# Altium PCB RadioPod_2.PcbDoc
Units mm, origin at the board's own origin, x right, y up, seen from the top; angles counter-clockwise.
Board outline 152.4 x 101.6 mm, 3 copper layers (Top Layer, GND, Bottom Layer), stack 0.488 mm thick; 79 components, 93 nets, 358 pads, 17 vias.
Unrouted connection lines stored in the file: 69.
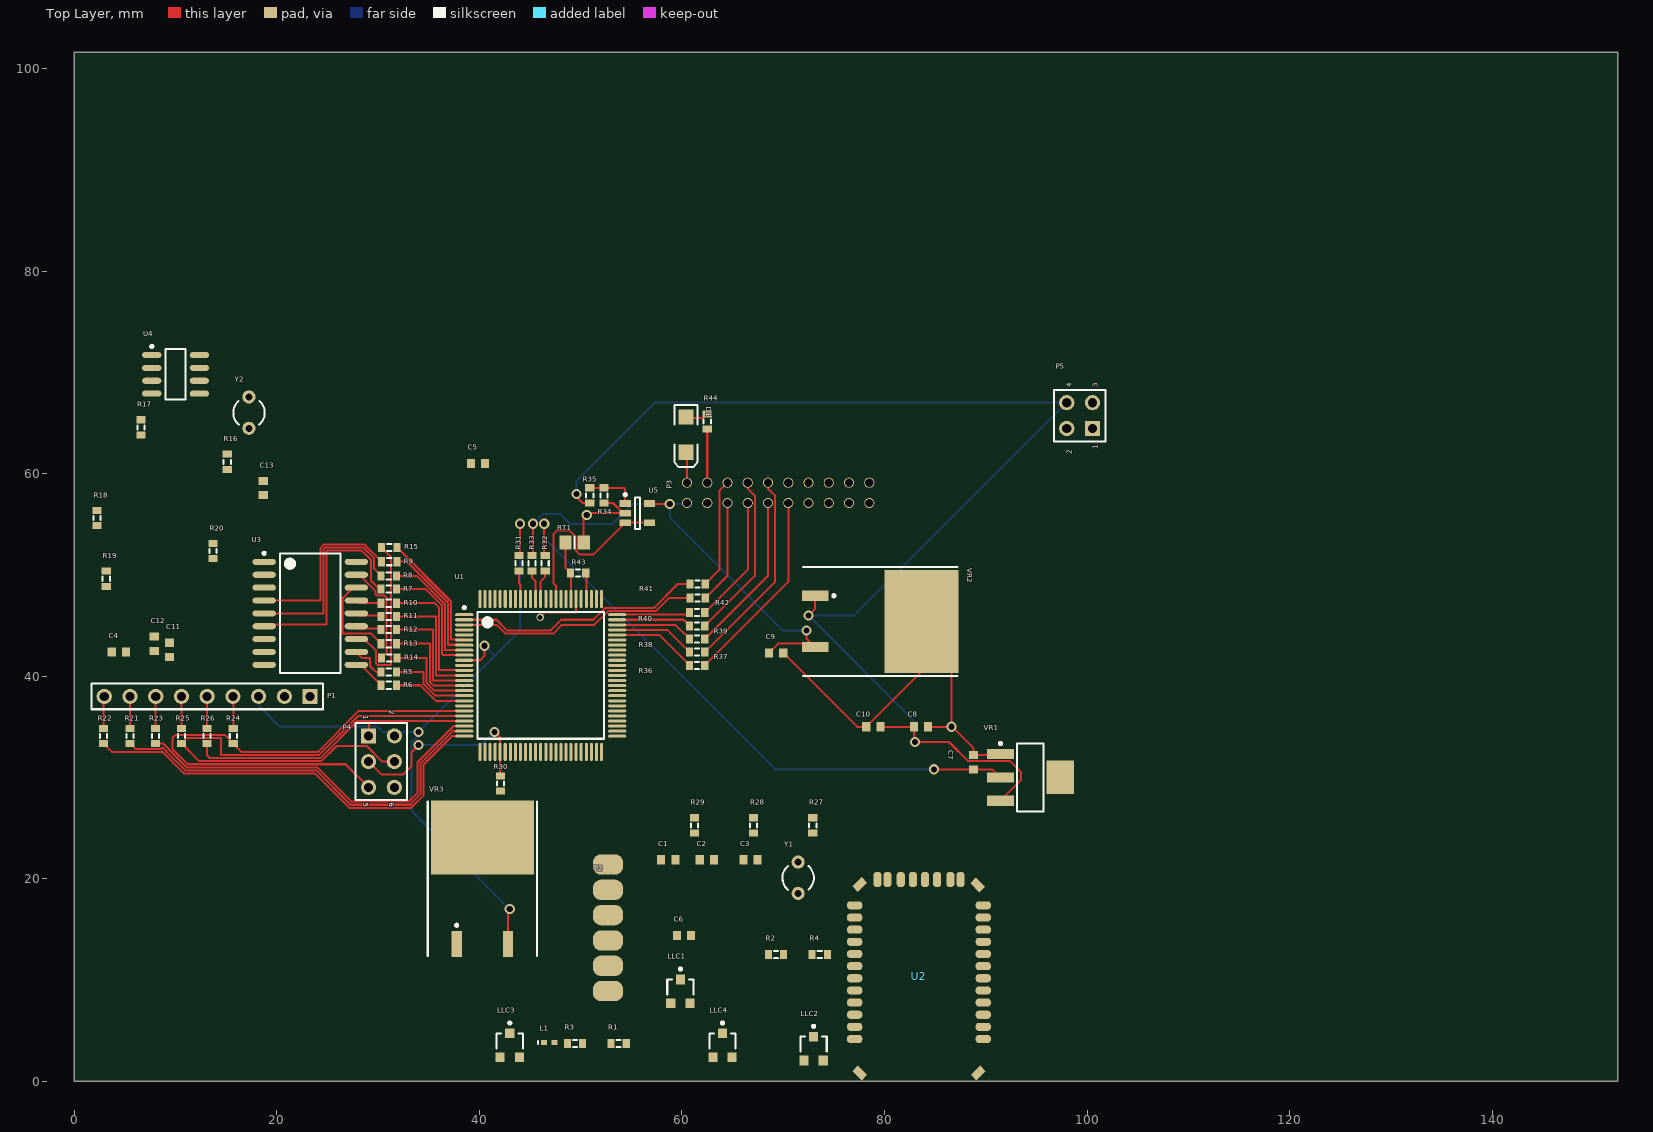
[diagram p0: Top Layer view]
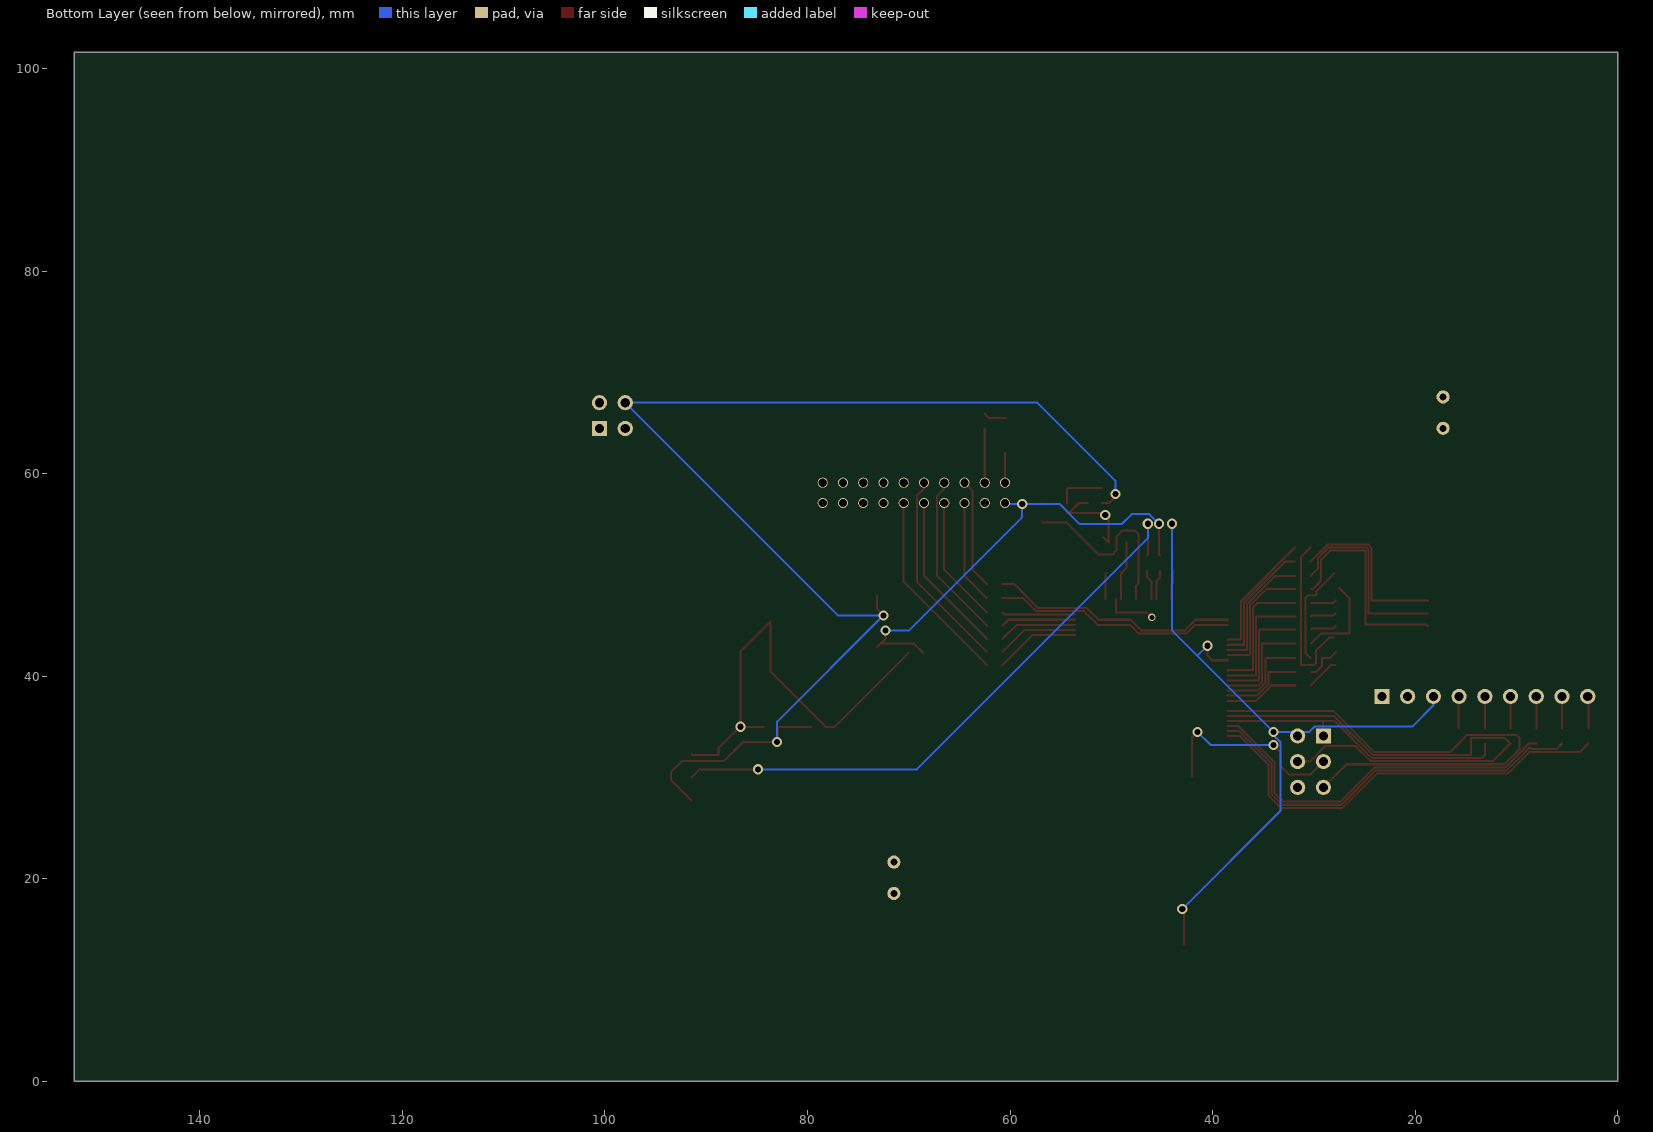
[diagram p1: Bottom Layer view, seen from below]
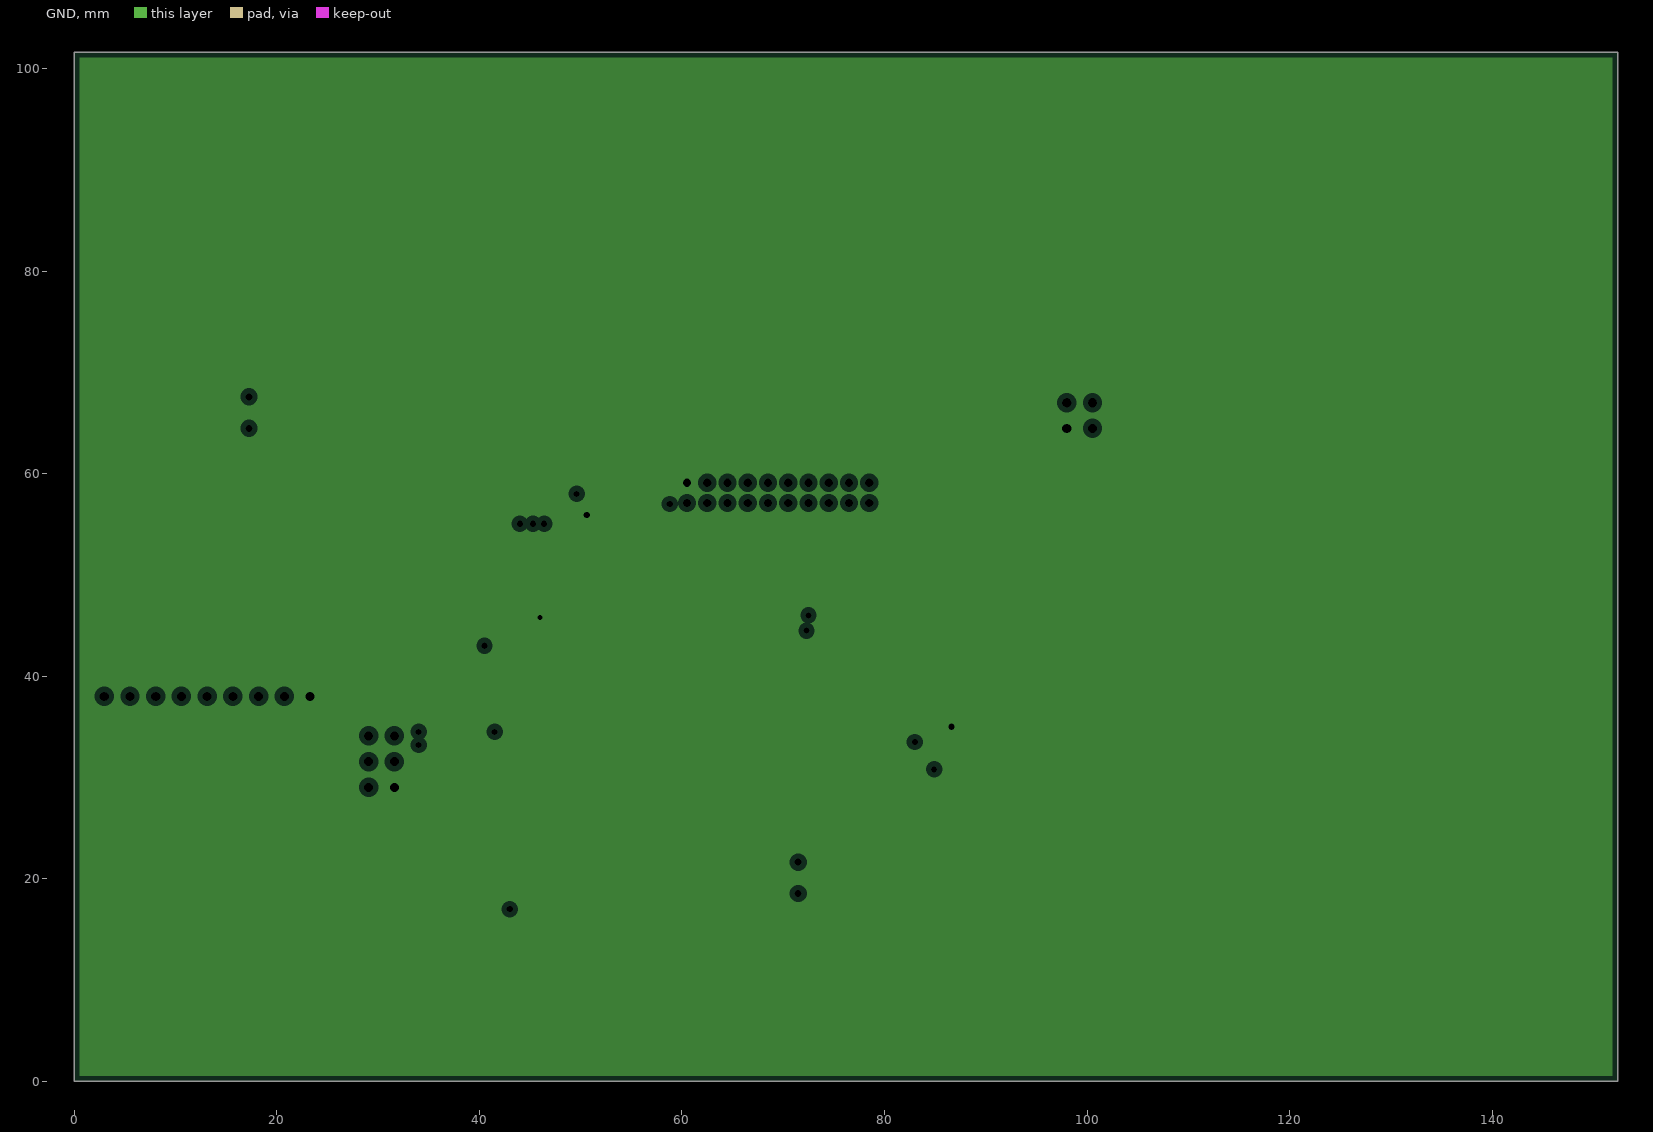
[diagram p2: GND, clearances drawn from the general rule]

## Layer stack, top to bottom
Top Solder: solder mask 0.0102, Solder Resist, Dk 3.5
Top Layer: signal copper 0.0356
Dielectric 1: core 0.254, FR-4, Dk 4.2
GND: plane copper 0.036, net GND
Dielectric 2: prepreg 0.127, Dk 4.2
Bottom Layer: signal copper 0.0356
Bottom Solder: solder mask 0.0102, Solder Resist, Dk 3.5

## Board outline
0,0 152.4,0 152.4,101.6 0,101.6

## Design rules (kind name [scope] priority, off if disabled: settings)
Clearance [All] p1: gap=0.1
PlaneClearance [All] p1: clearance=0.508
PlaneConnect [All] p1: planeconnectstyle=Relief reliefexpansion=0.508 reliefentries=4 reliefconductorwidth=0.254 reliefairgap=0.254
PolygonConnect [All] p1: connectstyle=Relief reliefconductorwidth=0.254 reliefentries=4 polygonreliefangle="90 Angle" airgapwidth=0.254
RoomDefinition RadioPod_2 [InComponentClass('RadioPod_2')] p1 off: confinementstyle=ConfineIn formatcopy=TRUE lockcomponents=FALSE outline 311.355,127.9 469.855,127.9 469.855,233.4 311.355,233.4
RoutingVias [All] p1: holewidth=0.711 width=1.27 viastyle="Through Hole" minholewidth=0.711 minwidth=1.27 maxholewidth=0.711 maxwidth=1.27
SolderMaskExpansion [All] p1: expansion=0.102
Width [All] p1: maxlimit=0.4 minlimit=0.05 preferedwidth=0.2 minimp=50.000000 maximp=50.000000 favimp=50.000000
28 further rules are at their usual default settings.

## Classes and differential pairs
component class RadioPod_2: 90 270 C1 C2 C3 C4 C5 C6 C7 C8 C9 C10 C11 C12 C13 L1 LLC1 LLC2 LLC3 LLC4 P2 P4 P5 R1 R2 R3 R4 R5 R6 R7 R8 R9 R10 R11 R12 R13 R14 R15 R16 R17 R18 R19 R20 R21 R22 R23 R24 R25 R26 R27 R28 R29 R30 R34 R35 R36 R37 R38 R39 R40 R41 R42 R43 R44 RT1 U1 U2 U3 U4 U5 VR1 VR2 VR3 Y1 Y2

## Components (designator, comment, footprint, x,y, rotation, side; value= is the part's Value field where it differs from the comment)
C1 "Cap Semi" 1608[0603] 58.645,21.868 r0 top
C2 "Cap Semi" 1608[0603] 62.455,21.868 r0 top
C3 "Cap Semi" 1608[0603] 66.773,21.868 r0 top
C4 "Cap Semi" 1608[0603] 4.4,42.4 r0 top
C5 "Cap Semi" 1608[0603] 39.859,61 r0 top
C6 "Cap Semi" 1608[0603] 60.2,14.4 r0 top
C7 "Cap Semi" 1608[0603] 88.8,31.5 r270 top
C8 "Cap Semi" 1608[0603] 83.6,35 r180 top
C9 "Cap Semi" 1608[0603] 69.3,42.3 r0 top
C10 "Cap Semi" 1608[0603] 78.9,35 r180 top
C11 "Cap Semi" 1608[0603] 9.4,42.6 r90 top
C12 "Cap Semi" 1608[0603] 7.9,43.2 r90 top
C13 "Cap Semi" 1608[0603] 18.655,58.568 r90 top
D1 "LED" 3.2X1.6X1.1 60.4,63.85 r270 top
L1 "Inductor" 0402-A 46.9,3.825 r0 top
LLC1 "BSS138" SOT-23 59.85,8.875 r0 top
LLC2 "BSS138" SOT-23 73,3.225 r0 top
LLC3 "BSS138" SOT-23 43,3.55 r0 top
LLC4 "BSS138" SOT-23 64,3.55 r0 top
P1 "Comment" HDR1X9 23.28,38 r180 top
P2 "EM-506" EM_506 51.2,7.9 r0 top
P3 "9XTend Header" "9XTend Header" 79,56.6 r90 top
P4 "ISP Header" HDR2X3 29.06,34.1 r270 top
P5 "Bus Connector" HDR2X2 100.54,64.46 r90 top
R1 "Res3" J1-0603 53.75,3.725 r0 top
R2 "Res3" J1-0603 69.293,12.5 r0 top
R3 "Res3" J1-0603 49.432,3.725 r0 top
R4 "Res3" J1-0603 73.611,12.5 r0 top
R5 "Res3" J1-0603 31.05,40.4 r0 top
R6 "Res3" J1-0603 31.05,39.1 r0 top
R7 "Res3" J1-0603 31.05,48.6 r0 top
R8 "Res3" J1-0603 31.05,49.9 r0 top
R9 "Res3" J1-0603 31.1,51.3 r0 top
R10 "Res3" J1-0603 31.05,47.2 r0 top
R11 "Res3" J1-0603 31.05,45.9 r0 top
R12 "Res3" J1-0603 31.05,44.6 r0 top
R13 "Res3" J1-0603 31.05,43.2 r0 top
R14 "Res3" J1-0603 31.1,41.8 r0 top
R15 "Res3" J1-0603 31.1,52.7 r0 top
R16 "Res3" J1-0603 15.104,61.165 r90 top
R17 "Res3" J1-0603 6.573,64.568 r90 top
R18 "Res3" J1-0603 2.249,55.618 r90 top
R19 "Res3" J1-0603 3.155,49.618 r90 top
R20 "Res3" J1-0603 13.7,52.35 r90 top
R21 "Res3" J1-0603 5.5,34.1 r270 top
R22 "Res3" J1-0603 2.9,34.1 r270 top
R23 "Res3" J1-0603 8,34.1 r270 top
R24 "Res3" J1-0603 15.7,34.1 r270 top
R25 "Res3" J1-0603 10.6,34.1 r270 top
R26 "Res3" J1-0603 13.1,34.1 r270 top
R27 "Res3" J1-0603 72.916,25.265 r90 top
R28 "Res3" J1-0603 67.074,25.265 r90 top
R29 "Res3" J1-0603 61.232,25.265 r90 top
R30 "Res3" J1-0603 42.1,29.4 r90 top
R31 "Res3" J1-0603 43.9,51.15 r90 top
R32 "Res3" J1-0603 46.5,51.15 r90 top
R33 "Res3" J1-0603 45.2,51.15 r90 top
R34 "Res3" J1-0603 50.9,57.85 r90 top
R35 "Res3" J1-0603 52.3,57.85 r90 top
R36 "Res3" J1-0603 61.505,41.068 r0 top
R37 "Res3" J1-0603 61.505,42.368 r0 top
R38 "Res3" J1-0603 61.505,43.668 r0 top
R39 "Res3" J1-0603 61.505,44.968 r0 top
R40 "Res3" J1-0603 61.505,46.268 r0 top
R41 "Res3" J1-0603 61.55,49.1 r0 top
R42 "Res3" J1-0603 61.55,47.7 r0 top
R43 "Res3" J1-0603 49.75,50.2 r180 top
R44 "Res3" J1-0603 62.5,65.15 r90 top
RT1 "Res Thermal" 6-0805_N 49.4,53.2 r0 top
U1 "ATmega1280-16AU" 100A_N 46.055,40.068 r0 top
U2 "RN-41" RN41 90.005,20.168 r180 top
U3 "MCP2515-I/SO" SOIC-SO18_N 23.3,46.2 r0 top
U4 "TJA1040" SO8_L 10,69.8 r0 top
U5 "MCP6001UT" SOT-23-OT5_N 55.6,56.1 r0 top
VR1 "NCV1117ST33T3G" SOT223_M 94.4,30 r0 top
VR2 "MC7805ACD2T" 936-03 78.4,45.4 r270 top
VR3 "MC7805ACD2T" 936-03 40.3,18.8 r0 top
Y1 "16MHz" R38 71.472,20.09 r0 top
Y2 "20MHz" R38 17.246,66.022 r0 top

## Footprints (in the part's own frame and the unit in brackets; to place one, negate y for a bottom-side part, rotate by r counter-clockwise, add the part's x,y. Pads: shape width x height; smd on the part's side, far side on the other; paste and mask are expansions set on the pad)
3.2X1.6X1.1 [mm] "SMT LED; 2 Flat Leads"
  rect 1.5x1.5 smd: 1(-1.75,0) 2(1.75,0)
  silkscreen extent -2.9,-1.15 3.2,1.15
6-0805_N [mm] "Chip Resistor, Body 2.0x1.2mm, IPC Medium Density"
  rect 1.2x1.4 smd: 1(-0.9,0) 2(0.9,0)
  silkscreen extent 0,-0.6 0,0.6, body extent -1.07,-0.7 1.07,0.7, height 0.7
"9XTend Header" [mm]
  round 1 hole 0.8: P1(0.5,18.5) P2(2.5,18.5) P3(0.5,16.5) P4(2.5,16.5) P5(0.5,14.5) P6(2.5,14.5) P7(0.5,12.5) P8(2.5,12.5) P9(0.5,10.5) P10(2.5,10.5) P11(0.5,8.5) P12(2.5,8.5) P13(0.5,6.5) P14(2.5,6.5) P15(0.5,4.5) P16(2.5,4.5) P17(0.5,2.5) P18(2.5,2.5) P19(0.5,0.5) P20(2.5,0.5)
100A_N [mm] "Thin QFP, 100-Leads, Body 14x14mm, Pitch 0.5mm, IPC Medium Density"
  oval 1.8x0.3 smd: 1(-7.55,6) 2(-7.55,5.5) 3(-7.55,5) 4(-7.55,4.5) 5(-7.55,4) 6(-7.55,3.5) 7(-7.55,3) 8(-7.55,2.5) 9(-7.55,2) 10(-7.55,1.5) 11(-7.55,1) 12(-7.55,0.5) 13(-7.55,0) 14(-7.55,-0.5) 15(-7.55,-1) 16(-7.55,-1.5) 17(-7.55,-2) 18(-7.55,-2.5) 19(-7.55,-3) 20(-7.55,-3.5) 21(-7.55,-4) 22(-7.55,-4.5) 23(-7.55,-5) 24(-7.55,-5.5) 25(-7.55,-6) 51(7.55,-6) 52(7.55,-5.5) 53(7.55,-5) 54(7.55,-4.5) 55(7.55,-4) 56(7.55,-3.5) 57(7.55,-3) 58(7.55,-2.5) 59(7.55,-2) 60(7.55,-1.5) 61(7.55,-1) 62(7.55,-0.5) 63(7.55,0) 64(7.55,0.5) 65(7.55,1) 66(7.55,1.5) 67(7.55,2) 68(7.55,2.5) 69(7.55,3) 70(7.55,3.5) 71(7.55,4) 72(7.55,4.5) 73(7.55,5) 74(7.55,5.5) 75(7.55,6)
  oval 0.3x1.8 smd: 26(-6,-7.55) 27(-5.5,-7.55) 28(-5,-7.55) 29(-4.5,-7.55) 30(-4,-7.55) 31(-3.5,-7.55) 32(-3,-7.55) 33(-2.5,-7.55) 34(-2,-7.55) 35(-1.5,-7.55) 36(-1,-7.55) 37(-0.5,-7.55) 38(0,-7.55) 39(0.5,-7.55) 40(1,-7.55) 41(1.5,-7.55) 42(2,-7.55) 43(2.5,-7.55) 44(3,-7.55) 45(3.5,-7.55) 46(4,-7.55) 47(4.5,-7.55) 48(5,-7.55) 49(5.5,-7.55) 50(6,-7.55) 76(6,7.55) 77(5.5,7.55) 78(5,7.55) 79(4.5,7.55) 80(4,7.55) 81(3.5,7.55) 82(3,7.55) 83(2.5,7.55) 84(2,7.55) 85(1.5,7.55) 86(1,7.55) 87(0.5,7.55) 88(0,7.55) 89(-0.5,7.55) 90(-1,7.55) 91(-1.5,7.55) 92(-2,7.55) 93(-2.5,7.55) 94(-3,7.55) 95(-3.5,7.55) 96(-4,7.55) 97(-4.5,7.55) 98(-5,7.55) 99(-5.5,7.55) 100(-6,7.55)
  silkscreen extent -7.67,-6.25 6.25,6.82, body extent -7,-7 7,7, height 1.2
0402-A [mm] "Chip Inductor, Body 1.0x0.5mm, IPC High Density"
  rect 0.6x0.5 smd: 1(-0.5,0) 2(0.5,0)
  silkscreen extent -1.1,-0.15 -1.1,0.15, body extent -0.55,-0.3 0.55,0.3, height 0.55
936-03 [mm] "D2-PAK/TO-263-AB; 3 Leads (1 Cropped); Body 14.7 (inc. leads) x 10.2 mm (LxW max)"
  rect 1x2.6 smd: 1(-2.54,-5.25) 3(2.54,-5.25)
  rect 10.2x7.3 smd: 4(0,5.25)
  silkscreen extent -5.4,-6.45 5.4,8.8
1608[0603] [mm] "Chip Capacitor, Body 1.6x0.8mm, IPC High Density"
  rect 0.8x0.9 smd: 1(-0.7,0) 2(0.7,0)
  body extent -0.87,-0.48 0.87,0.48, height 1.3
EM_506 [mm]
  rrect80% 3x2 smd: A1(1.5,1) A2(1.5,3.5) A3(1.5,6) A4(1.5,8.5) A5(1.5,11) A6(1.5,13.5)
HDR1X9 [mm] "Connector; Header; 9 Position"
  rect 1.5x1.5 hole 0.9: 1(0,0)
  round 1.5 hole 0.9: 2(2.54,0) 3(5.08,0) 4(7.62,0) 5(10.16,0) 6(12.7,0) 7(15.24,0) 8(17.78,0) 9(20.32,0)
  silkscreen extent -1.27,-1.27 21.59,1.27
HDR2X2 [mm] "Connector; Header; 2x2 Position"
  rect 1.5x1.5 hole 0.9: 1(0,0)
  round 1.5 hole 0.9: 2(0,2.54) 3(2.54,0) 4(2.54,2.54)
  silkscreen extent -1.27,-1.27 3.81,3.81
HDR2X3 [mm] "Connector; Header; 3x2 Position"
  rect 1.5x1.5 hole 0.9: 1(0,0)
  round 1.5 hole 0.9: 2(0,2.54) 3(2.54,0) 4(2.54,2.54) 5(5.08,0) 6(5.08,2.54)
  silkscreen extent -1.27,-1.27 6.35,3.81
J1-0603 [mm] "Chip Resistor, Body 1.6x0.8mm, IPC High Density"
  rect 0.7x0.9 smd: 1(-0.75,0) 2(0.75,0)
  silkscreen extent -0.2,-0.35 0.2,0.35, body extent -0.85,-0.48 0.85,0.48, height 0.9
R38 [mm] "Crystal, Thru-Hole; 2 Leads; Body 3.1 x 8.2 mm (Dia.xH)"
  round 1.3 hole 0.7: 1(0,1.55) 2(0,-1.55)
  silkscreen extent -1.55,-1.19 1.55,1.17
RN41 [mm]
  rrect80% 1.5x0.8 smd: A1(0.25,16) A2(0.25,14.8) A3(0.25,13.6) A4(0.25,12.4) A5(0.25,11.2) A6(0.25,10) A7(0.25,8.8) A8(0.25,7.6) A9(0.25,6.4) A10(0.25,5.2) A11(0.25,4) A12(0.25,2.8) A21(12.95,2.8) A22(12.95,4) A23(12.95,5.2) A24(12.95,6.4) A25(12.95,7.6) A26(12.95,8.8) A27(12.95,10) A28(12.95,11.2) A29(12.95,12.4) A30(12.95,13.6) A31(12.95,14.8) A32(12.95,16)
  rrect80% 0.8x1.5 smd: A13(2.5,0.25) A14(3.5,0.25) A15(4.8,0.25) A16(6,0.25) A17(7.2,0.25) A18(8.4,0.25) A19(9.7,0.25) A20(10.7,0.25)
  rect 0.8x1.3 smd rot 135: SH1(0.75,19.35) SH3(12.45,0.75)
  rect 0.8x1.3 smd rot 45: SH2(0.8,0.8) SH4(12.45,19.35)
  body extent 1,1 12.2,25.8, height 1
SO8_L [mm] "SOIC, 8-Leads, Body 4.9x3.9mm, Pitch 1.27mm, IPC High Density"
  oval 1.9x0.6 smd: 1(-2.35,1.905) 2(-2.35,0.635) 3(-2.35,-0.635) 4(-2.35,-1.905) 5(2.35,-1.905) 6(2.35,-0.635) 7(2.35,0.635) 8(2.35,1.905)
  silkscreen extent -2.47,-2.5 1,2.88, body extent -2,-2.5 2,2.5, height 1.75
SOIC-SO18_N [mm] "SOIC, 18-Leads, Body 11.5x7.5mm, Pitch 1.27mm, IPC Medium Density"
  oval 2.3x0.6 smd: 1(-4.55,5.08) 2(-4.55,3.81) 3(-4.55,2.54) 4(-4.55,1.27) 5(-4.55,0) 6(-4.55,-1.27) 7(-4.55,-2.54) 8(-4.55,-3.81) 9(-4.55,-5.08) 10(4.55,-5.08) 11(4.55,-3.81) 12(4.55,-2.54) 13(4.55,-1.27) 14(4.55,0) 15(4.55,1.27) 16(4.55,2.54) 17(4.55,3.81) 18(4.55,5.08)
  silkscreen extent -4.67,-5.9 3,6.05, body extent -3.8,-5.95 3.8,5.95, height 2.65
SOT223_M [mm] "SOT223, 4-Leads, Body 6.5x3.5mm, Pitch 2.3mm, Lead Span 7mm, IPC Low Density"
  rect 2.7x1 smd: 1(-2.95,2.3) 2(-2.95,0) 3(-2.95,-2.3)
  rect 2.7x3.3 smd: 4(2.95,0)
  silkscreen extent -3.07,-3.35 1.3,3.47, body extent -1.85,-3.35 1.85,3.35, height 1.7
SOT-23 [mm] "SOT-23; 3 Leads; Body 3.0 x 2.5 mm, inc. leads (LxW max), Alternate Lead Configuration"
  rect 0.9x0.95 smd: 1(0,1.175) 2(-0.95,-1.175) 3(0.95,-1.175)
  silkscreen extent -1.3,-0.3 1.3,2.32
SOT-23-OT5_N [mm] "SOT23, 5-Leads, Body 2.9x1.6mm, Pitch 0.95mm, Lead Span 2.7mm, IPC Medium Density"
  rect 1.1x0.65 smd: 1(-1.2,0.95) 2(-1.2,0) 3(-1.2,-0.95) 4(1.2,-0.95) 5(1.2,0.95)
  silkscreen extent -1.32,-1.55 0.25,1.95, body extent -0.9,-1.55 0.9,1.55, height 1.45

## Part data
C1 C2 C3 C4 C5 C6 C7 C8 C9 C10 C11 C12 C13: "Capacitor (Semiconductor SIM Model)"
D1: library part LED2
LLC1 LLC2 LLC3 LLC4: "BSS138 Logic Level Enhancement Mode FET"
P2: "EM-506 GPS Module Pads"
P3: library part 9XTend
P4: library part "Header 3X2", "Header, 3-Pin, Dual row"
P5: library part "Header 2X2", "Header, 2-Pin, Dual row"
R1 R2 R3 R4 R5 R6 R7 R8 R9 R10 R11 R12 R13 R14 R15 R16 R17 R18 R19 R20 R21 R22 R23 R24 R25 R26 R27 R28 R29 R30 R31 R32 R33 R34 R35 R36 R37 R38 R39 R40 R41 R42 R43 R44: "Resistor"
RT1: "Thermistor"
U1: "8-bit AVR Microcontroller, 2.7-5.5V, 128KB Flash, 4KB EEPROM, 8KB SRAM, 86 GPIO pins, 100-pin TQFP, Industrial Grade (-40°C to 85°C), Pb-Free"
U2: library part RN41, "RN-41 Bluetooth Module"
U3: "Stand-Alone CAN Controller With SPI Interface, 18-Pin SOIC, Industrial Temperature"
U5: library part MCP6001UT-I/OT, "1 MHz, Low-Power Operational Amplifier, 5-Pin SOT-23, Industrial Temperature, Tape and Reel"
VR2 VR3: "Three-Terminal Positive Voltage Regulator"
Y1 Y2: library part XTAL, "Crystal Oscillator"

## Via types
v1: diameter 1, hole 0.6, Top Layer to Bottom Layer, 16 vias
v2: diameter 0.75, hole 0.5, Top Layer to Bottom Layer, 1 vias

## Nets (pads, with @x,y where several pads share a name; then routed paths per layer and width w, separated by ;. In a path a pad name is that pad's centre, name@x,y a point inside that pad or via, vN(x,y) a via of type N, cw(c..) or ccw(c..) an arc to the next point about the centre after c; other vN are vias at no path point)
CLK: P4.5 R24.2 U1.20 | length 53.3
  Top Layer w0.2: P4.5 26.78,31.3 11.2,31.3 9.7,32.8 9.7,33.9 10,34.2 14.85,34.2 R24.2 16.55,32.5 24.027,32.5 28.095,36.568 U1.20
GLV: C8.2 C10.1 C11.2 P5.4 R34.1 VR1.3 VR2.1 VR3.1 | length 128.7
  Top Layer w0.2: v1(49.6,58) 49.3,58 50.2,57.1 R34.1 ; v1(72.5,46) 73.15,46.65 VR2.1 ; C10.1 C8.2 82.9,33.6 v1(83,33.5) 86.367,33.5 88.267,31.6 92.4,31.6 93.5,30.5 93.5,29.75 VR1.3
  Bottom Layer w0.2: v1(49.6,58) 49.6,59.3 57.3,67 P5.4 77,46 v1(72.5,46) 83,35.5 v1(83,33.5)
GND: C1.1 C2.1 C3.1 C4.2 C5.2 C6.2 C7.1 C8.1 C9.2 C10.2 C11.1 C12.1 C13.1 D1.2 P1.1 P3.P2 P4.6 P5.2 R30.1 R35.1 RT1.2 U1.11 U1.32 U1.62 U1.81 U1.99 U3.3 U3.9 U4.2 U5.2 VR1.1 VR2.4 VR3.4 | length 61.9
  Top Layer w0.2: v2(46,45.8) 46.5,46.3 49.555,46.3 U1.81 ; v1(50.6,55.9) 50.3,55.6 RT1.2 RT1.2@50.8,53.7 ; v1@50.6,56.1 U5.2@54.192,56.1 ; R35.1 53.192,57.1 U5.2@54.192,56.1 ; U5.2 U5.2@54.192,56.1 ; P3.P2 D1.2@60.5,62.1 ; C9.2 77.3,35 C10.2 83.65,40.45 VR2.4 86.6,42.45 86.6,35.1 88.8,32.9 C7.1 91.35,32.2 VR1.1 ; C8.1 v1(86.6,35)
MISO: P4.1 R26.2 U1.22 | length 29.7
  Top Layer w0.2: R26.2 13.1,32.2 13.4,31.9 24.276,31.9 27.944,35.568 29.1,35.568 ; P4.1 29.1,34.14 29.1,35.568 ; U1.22 29.1,35.568
MOSI: P4.4 R25.2 U1.21 | length 54.4
  Top Layer w0.2: P4.4 30.404,31.56 28.864,33.1 25.9,33.1 24.4,31.6 12.35,31.6 R25.2 11.15,33.9 14.5,33.9 14.5,32.2 24.151,32.2 28.019,36.068 U1.21
NetC1_2: C1.2 U1.34 Y1.1
NetC2_2: C2.2 U1.33 Y1.2
NetC4_1: C4.1 U3.7 Y2.2
NetC5_1: C5.1 U3.8 Y2.1
NetC6_1: C6.1 U1.98
NetC13_2: C13.2 R16.1 R19.1 U4.5
NetD1_1: D1.1 R44.2 | length 2.3
  Top Layer w0.2: D1.1@60.4,65.5 62.1,65.5 R44.2
NetL1_1: L1.1 U1.100
NetLLC1_1: LLC1.1 LLC1.3 U1.64
NetLLC1_2: LLC1.2 R2.2
NetLLC2_1: LLC2.1 LLC2.3
NetLLC2_2: LLC2.2 R3.1 U1.63
NetLLC3_1: LLC3.1 LLC3.3 U1.66
NetLLC3_2: LLC3.2 R4.2
NetLLC4_1: LLC4.1 LLC4.3
NetLLC4_2: LLC4.2 R1.1 U1.65
NetP1_4: P1.4 R24.1 | length 3.2
  Top Layer w0.2: P1.4 15.7,37.96 R24.1
NetP1_5: P1.5 R26.1 | length 3.2
  Top Layer w0.2: R26.1 13.12,34.87 P1.5
NetP1_6: P1.6 R25.1 | length 3.2
  Top Layer w0.2: P1.6 10.6,37.98 R25.1
NetP1_7: P1.7 R23.1 | length 3.2
  Top Layer w0.2: R23.1 8,37.96 P1.7
NetP1_8: P1.8 R21.1 | length 3.2
  Top Layer w0.2: R21.1 P1.8
NetP1_9: P1.9 R22.1 | length 3.2
  Top Layer w0.2: R22.1 2.9,37.94 P1.9
NetP2_3: R27.1
NetP2_4: R28.1
NetP2_6: R29.1
NetP3_4: P3.P4 R44.1 | length 5.3
  Top Layer w0.2: P3.P4 R44.1
NetP3_5: P3.P5 R42.2 | length 10.3
  Top Layer w0.2: R42.2 64.5,49.9 P3.P5
NetP3_6: P3.P6 R41.2 | length 10.9
  Top Layer w0.2: R41.2 63.7,50.5 63.7,58.3 P3.P6
NetP3_7: P3.P7 R40.2 | length 12.6
  Top Layer w0.2: R40.2 66.5,50.513 P3.P7
NetP3_8: P3.P8 R39.2 | length 16.5
  Top Layer w0.2: R39.2 67.2,49.913 67.2,57.8 66.5,58.5 P3.P8
NetP3_9: P3.P9 R38.2 | length 16
  Top Layer w0.2: R38.2 68.5,49.913 P3.P9
NetP3_10: P3.P10 R37.2 | length 19.9
  Top Layer w0.2: R37.2 69.2,49.313 69.2,57.8 68.5,58.5 P3.P10
NetP3_11: P3.P11 R36.2 | length 19.4
  Top Layer w0.2: R36.2 70.5,49.313 P3.P11
NetR5_1: R5.1 U3.11 | length 3.8
  Top Layer w0.2: U3.11@27.83,42.37 28.4,41.8 29.2,41.8 29.2,41 29.8,40.4 R5.1
NetR5_2: R5.2 U1.17 | length 8.4
  Top Layer w0.2: R5.2 34.5,40.4 34.5,39.195 35.627,38.068 U1.17
NetR6_1: R6.1 U3.10 | length 3.3
  Top Layer w0.2: U3.10 28.28,41.12 R6.1
NetR6_2: R6.2 U1.18 | length 7.4
  Top Layer w0.2: R6.2 34.2,39.1 34.2,39.071 35.703,37.568 U1.18
NetR7_1: R7.1 U3.6 | length 21.7
  Top Layer w0.2: U3.6 18.92,45.1 24.9,45.1 24.9,52.4 28.401,52.4 29.3,51.501 29.3,49.4 30.1,48.6 R7.1
NetR7_2: R7.2 U1.9 | length 12.2
  Top Layer w0.2: R7.2 34.7,48.6 36.3,47 36.3,42.197 36.397,42.1 U1.9@38.473,42.1
NetR8_1: R8.1 U3.5 | length 19.7
  Top Layer w0.2: U3.5 24.6,46.2 24.6,52.524 24.776,52.7 28.526,52.7 29.6,51.626 29.6,50.6 R8.1
NetR8_2: R8.2 U1.8 | length 12.4
  Top Layer w0.2: R8.2 33.824,49.9 36.6,47.124 36.6,42.6 38.473,42.6 U1.8
NetR9_1: R9.1 U3.4 | length 17.6
  Top Layer w0.2: U3.4 24.3,47.47 24.3,52.649 24.651,53 28.65,53 R9.1
NetR9_2: R9.2 U1.7 | length 12.5
  Top Layer w0.2: R9.2 32.849,51.3 36.9,47.249 36.9,43.1 38.473,43.1 U1.7
NetR10_1: R10.1 U3.15 | length 2.6
  Top Layer w0.2: U3.15 28.082,47.238 30.262,47.238 R10.1
NetR10_2: R10.2 U1.12 | length 13.1
  Top Layer w0.2: R10.2 35.6,47.2 36,46.8 36,40.6 38.473,40.6 U1.12
NetR11_1: R11.1 U3.14 | length 2.6
  Top Layer w0.2: U3.14 28.082,45.968 30.232,45.968 R11.1
NetR11_2: R11.2 U1.13 | length 12.5
  Top Layer w0.2: R11.2 35.7,45.9 35.7,40.068 U1.13
NetR12_1: R12.1 U3.13 | length 2.6
  Top Layer w0.2: U3.13 28.082,44.698 30.202,44.698 R12.1
NetR12_2: R12.2 U1.14 | length 11.7
  Top Layer w0.2: R12.2 35.4,44.6 35.4,39.568 U1.14
NetR13_1: R13.1 U3.16 | length 9.2
  Top Layer w0.2: U3.16@27.5,48.7 26.505,47.705 26.505,47.738 26.5,47.743 26.5,44.2 26.498,44.198 29.302,44.198 R13.1
NetR13_2: R13.2 U1.15 | length 10.6
  Top Layer w0.2: R13.2 35.1,43.2 35.1,39.444 35.476,39.068 U1.15
NetR14_1: R14.1 U3.17 | length 10.2
  Top Layer w0.2: U3.17@27.994,50.154 29.75,48.397 29.75,48.067 29.867,47.95 30.633,47.95 30.85,47.733 30.85,42.3 R14.1
NetR14_2: R14.2 U1.16 | length 9.4
  Top Layer w0.2: R14.2 34.8,41.8 34.8,39.319 35.551,38.568 U1.16
NetR15_1: R15.1 U3.12 | length 17.1
  Top Layer w0.2: U3.12@27.994,43.804 28.496,43.804 29.8,42.5 29.8,41.267 29.967,41.1 31.25,41.1 31.25,51.8 R15.1
NetR15_2: R15.2 U1.6 | length 12.6
  Top Layer w0.2: R15.2 31.873,52.7 37.2,47.373 37.2,43.6 38.473,43.6 U1.6
NetR16_2: R16.2 U4.6
NetR17_1: R17.1 U4.1
NetR17_2: R17.2 U3.2
NetR18_1: R18.1 U4.4
NetR18_2: R18.2 U3.1
NetR19_2: R19.2 U4.7
NetR20_1: R20.1 U4.8
NetR20_2: R20.2 U1.5
NetR21_2: R21.2 U1.24 | length 40.4
  Top Layer w0.2: R21.2 6.05,32.8 8.533,32.8 8.633,32.9 8.796,32.9 9.1,32.596 9.1,32.551 10.951,30.7 23.876,30.7 27.276,27.3 33.124,27.3 34.2,28.376 34.2,31.4 37.368,34.568 U1.24
NetR22_2: R22.2 U1.25 | length 43
  Top Layer w0.2: R22.2 3.75,32.5 8.771,32.5 8.8,32.471 8.8,32.427 10.827,30.4 23.751,30.4 27.151,27 33.249,27 34.5,28.251 34.5,31.276 37.292,34.068 U1.25
NetR23_2: R23.2 U1.23 | length 37.8
  Top Layer w0.2: R23.2 8.77,33.35 9.4,32.72 9.4,32.676 11.076,31 24,31 27.4,27.6 33,27.6 33.9,28.5 33.9,31.524 37.444,35.068 U1.23
NetR27_2: R27.2 U1.46
NetR28_2: R28.2 U1.45
NetR29_2: R29.2 U1.47
NetR31_1: R31.1 U1.92 | length 2.8
  Top Layer w0.2: R31.1 43.9,49.2 44.055,49.045 U1.92
NetR32_1: R32.1 U1.88 | length 3
  Top Layer w0.2: U1.88 46.055,49.355 46.5,49.8 R32.1
NetR33_1: R33.1 U1.89 | length 2.9
  Top Layer w0.2: R33.1 45.2,49.7 45.555,49.345 U1.89
NetR34_2: R34.2 R35.2 U5.1 | length 5
  Top Layer w0.2: R34.2 R35.2 54.3,58.6 54.4,58.5 U5.1
NetR36_1: R36.1 U1.71 | length 8.4
  Top Layer w0.2: U1.71 57.755,44.068 R36.1
NetR37_1: R37.1 U1.72 | length 8.1
  Top Layer w0.2: U1.72 58.555,44.568 R37.1
NetR38_1: R38.1 U1.73 | length 7.7
  Top Layer w0.2: U1.73 59.355,45.068 R38.1
NetR39_1: R39.1 U1.74 | length 7.4
  Top Layer w0.2: U1.74 60.155,45.568 R39.1
NetR40_1: R40.1 U1.75 | length 7.2
  Top Layer w0.2: U1.75 60.555,46.068 R40.1
NetR41_1: R41.1 U1.2 | length 24.6
  Top Layer w0.2: U1.2 41.691,45.568 42.759,44.5 46.996,44.5 48.064,45.568 51.25,45.568 52.4,46.718 57.218,46.718 59.6,49.1 R41.1
NetR42_1: R42.1 U1.3 | length 24.1
  Top Layer w0.2: U1.3 41.719,45.068 42.587,44.2 47.278,44.2 48.146,45.068 51.36,45.068 52.71,46.418 57.418,46.418 58.7,47.7 R42.1
NetR43_1: R43.1 U1.79 | length 2.6
  Top Layer w0.2: R43.1 50.555,50.145 U1.79
NetR43_2: R43.2 RT1.1 U1.82 | length 5.8
  Top Layer w0.2: RT1.1 48.5,50.7 R43.2 49.055,50.145 U1.82
NetU1_85: U1.85 U5.3 U5.4 | length 19.3
  Top Layer w0.2: U1.85 47.555,48.945 47.3,49.2 47.3,54 47.7,54.4 48.883,54.4 49.5,53.783 49.5,52.417 49.917,52 51.25,52 U5.3 U5.4
NetU2_1: 
RST: C3.2 P4.3 R30.2 U1.30 | length 20.1
  Top Layer w0.2: P4.3 30.32,30.3 32.5,30.3 33.3,31.1 33.3,32.5 v1(34,33.2) ; v1(41.5,34.5) 42.055,33.945 U1.30 R30.2@42.055,30.15
  Bottom Layer w0.2: v1(34,33.2) 40.2,33.2 v1(41.5,34.5)
VCC_VR1: C7.2 R2.1 R4.1 R32.2 VR1.2 VR1.4 | length 59.5
  Top Layer w0.2: v1(46.4,55.05) 46.4,52 R32.2 ; v1(84.9,30.8) C7.2 90.65,30.8 VR1.2
  Bottom Layer w0.2: v1(46.4,55.05) 46.4,53.6 69.2,30.8 v1(84.9,30.8)
VCC_VR2: C9.1 P3.P1 R33.2 U5.5 VR2.3 | length 48.6
  Top Layer w0.2: R33.2 45.3,52 v1(45.3,55.05) ; U5.5 56.85,57 v1(58.8,57) ; C9.1 69.5,43.2 72.81,43.2 VR2.3 72.3,43.71 v1(72.3,44.5)
  Bottom Layer w0.2: v1(45.3,55.05) 46.25,56 48,56 49,55 53.1,55 55.1,57 v1(58.8,57) ; P3.P1 60.4,57 v1(58.8,57) ; v1(72.3,44.5) 70,44.5 58.8,55.7 v1(58.8,57)
VCC_VR3: C12.2 L1.2 P1.3 P4.2 R1.2 R3.2 R31.2 U1.10 U1.31 U1.61 U1.80 U3.18 U4.3 VR3.3 | length 75.6
  Top Layer w0.2: U1.10 40.068,41.568 40.5,42 v1(40.5,43) ; VR3.3 42.84,16.84 v1(43,17) ; R31.2 44,52 v1(44,55.05)
  Bottom Layer w0.2: P1.3 18.2,37.1 20.25,35.05 29.893,35.05 30.443,34.5 v1(34,34.5) ; v1(40.5,43) 41.5,42 ; v1(43,17) 33.3,26.7 33.3,33.49 34,34.19 v1(34,34.5) ; v1(44,55.05) 44,44.5 41.5,42 ; v1(34,34.5) 41.5,42
pads on no net: P1.2 P2.A1 P2.A2 P2.A3 P2.A4 P2.A5 P2.A6 P3.P3 P3.P12 P3.P13 P3.P14 P3.P15 P3.P16 P3.P17 P3.P18 P3.P19 P3.P20 P5.1 P5.3 U1.1 U1.4 U1.19 U1.26 U1.27 U1.28 U1.29 U1.35 U1.36 U1.37 U1.38 U1.39 U1.40 U1.41 U1.42 U1.43 U1.44 U1.48 U1.49 U1.50 U1.51 U1.52 U1.53 U1.54 U1.55 U1.56 U1.57 U1.58 U1.59 U1.60 U1.67 U1.68 U1.69 U1.70 U1.76 U1.77 U1.78 U1.83 U1.84 U1.86 U1.87 U1.90 U1.91 U1.93 U1.94 U1.95 U1.96 U1.97 U2.A1 U2.A2 U2.A3 U2.A4 U2.A5 U2.A6 U2.A7 U2.A8 U2.A9 U2.A10 U2.A11 U2.A12 U2.A13 U2.A14 U2.A15 U2.A16 U2.A17 U2.A18 U2.A19 U2.A20 U2.A21 U2.A22 U2.A23 U2.A24 U2.A25 U2.A26 U2.A27 U2.A28 U2.A29 U2.A30 U2.A31 U2.A32 U2.SH1 U2.SH2 U2.SH3 U2.SH4

## Polygon pours and split planes (outlines as drawn)
GND on GND (split plane): 151.89,0.51 0.51,0.51 0.51,101.09 151.89,101.09

## Text inside footprints (layer, text, board x,y; h text height)
P4: Top Overlay "1" at 28.552,36.132 h0.5 r270; Top Overlay "2" at 31.092,36.64 h0.5 r270; Top Overlay "5" at 28.552,27.496 h0.5 r270; Top Overlay "6" at 31.092,27.496 h0.5 r270
P5: Top Overlay "3" at 101.048,68.524 h0.5 r90; Top Overlay "4" at 98.508,68.524 h0.5 r90; Top Overlay "2" at 98.508,61.92 h0.5 r90; Top Overlay "1" at 101.048,62.428 h0.5 r90